# Altium PCB omni robot pcb.PcbDoc
Units mm, origin at the board's own origin, x right, y up, seen from the top; angles counter-clockwise.
Board outline 100 x 100 mm, 2 copper layers (Top Layer, Bottom Layer); 26 components, 63 nets, 301 pads, 50 vias.
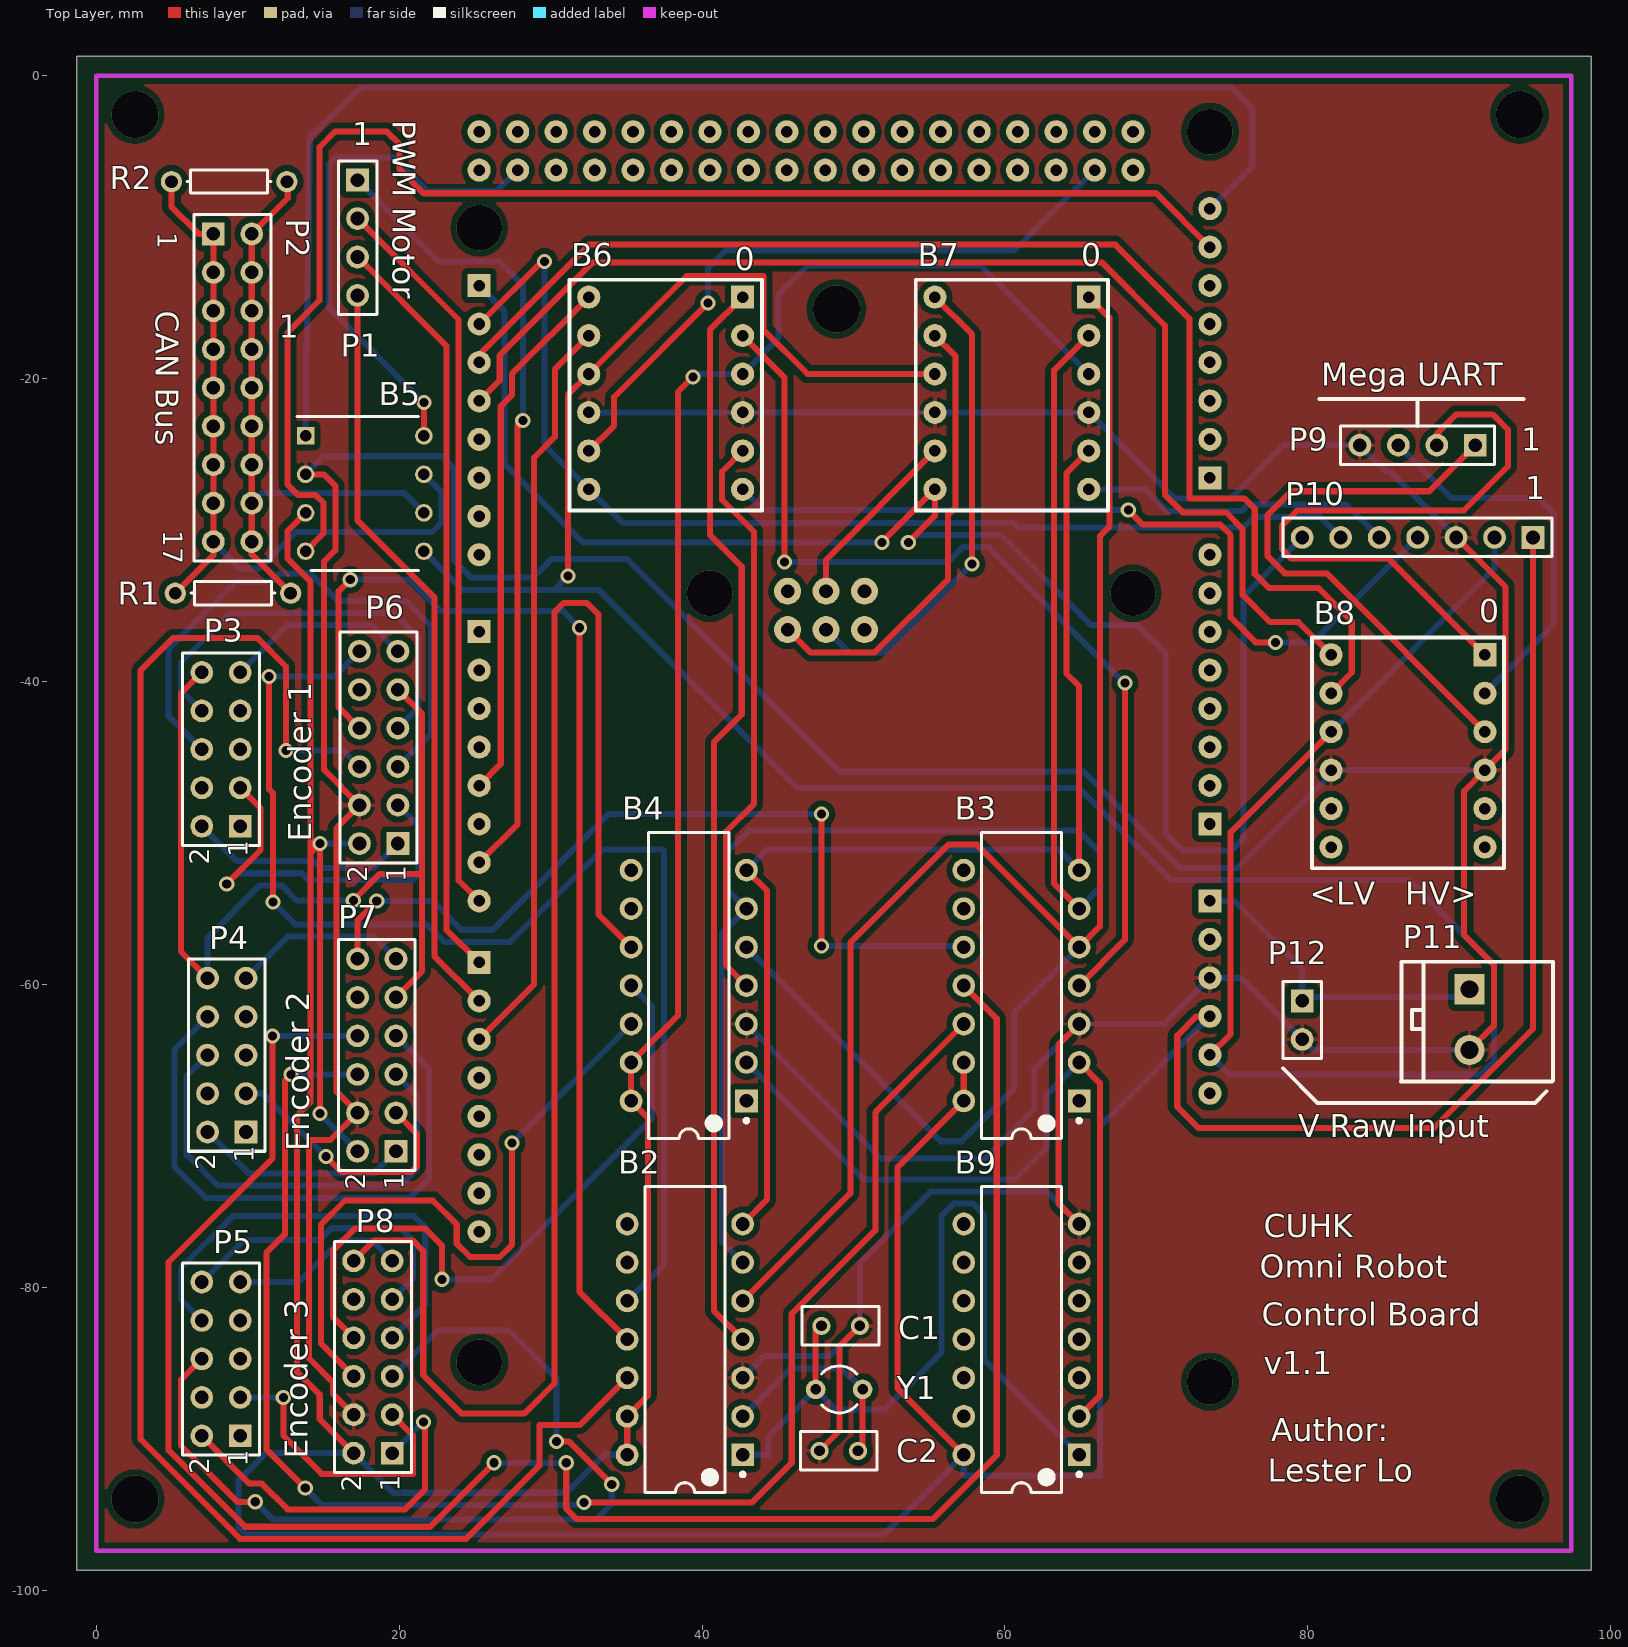
[diagram p0: Top Layer view]
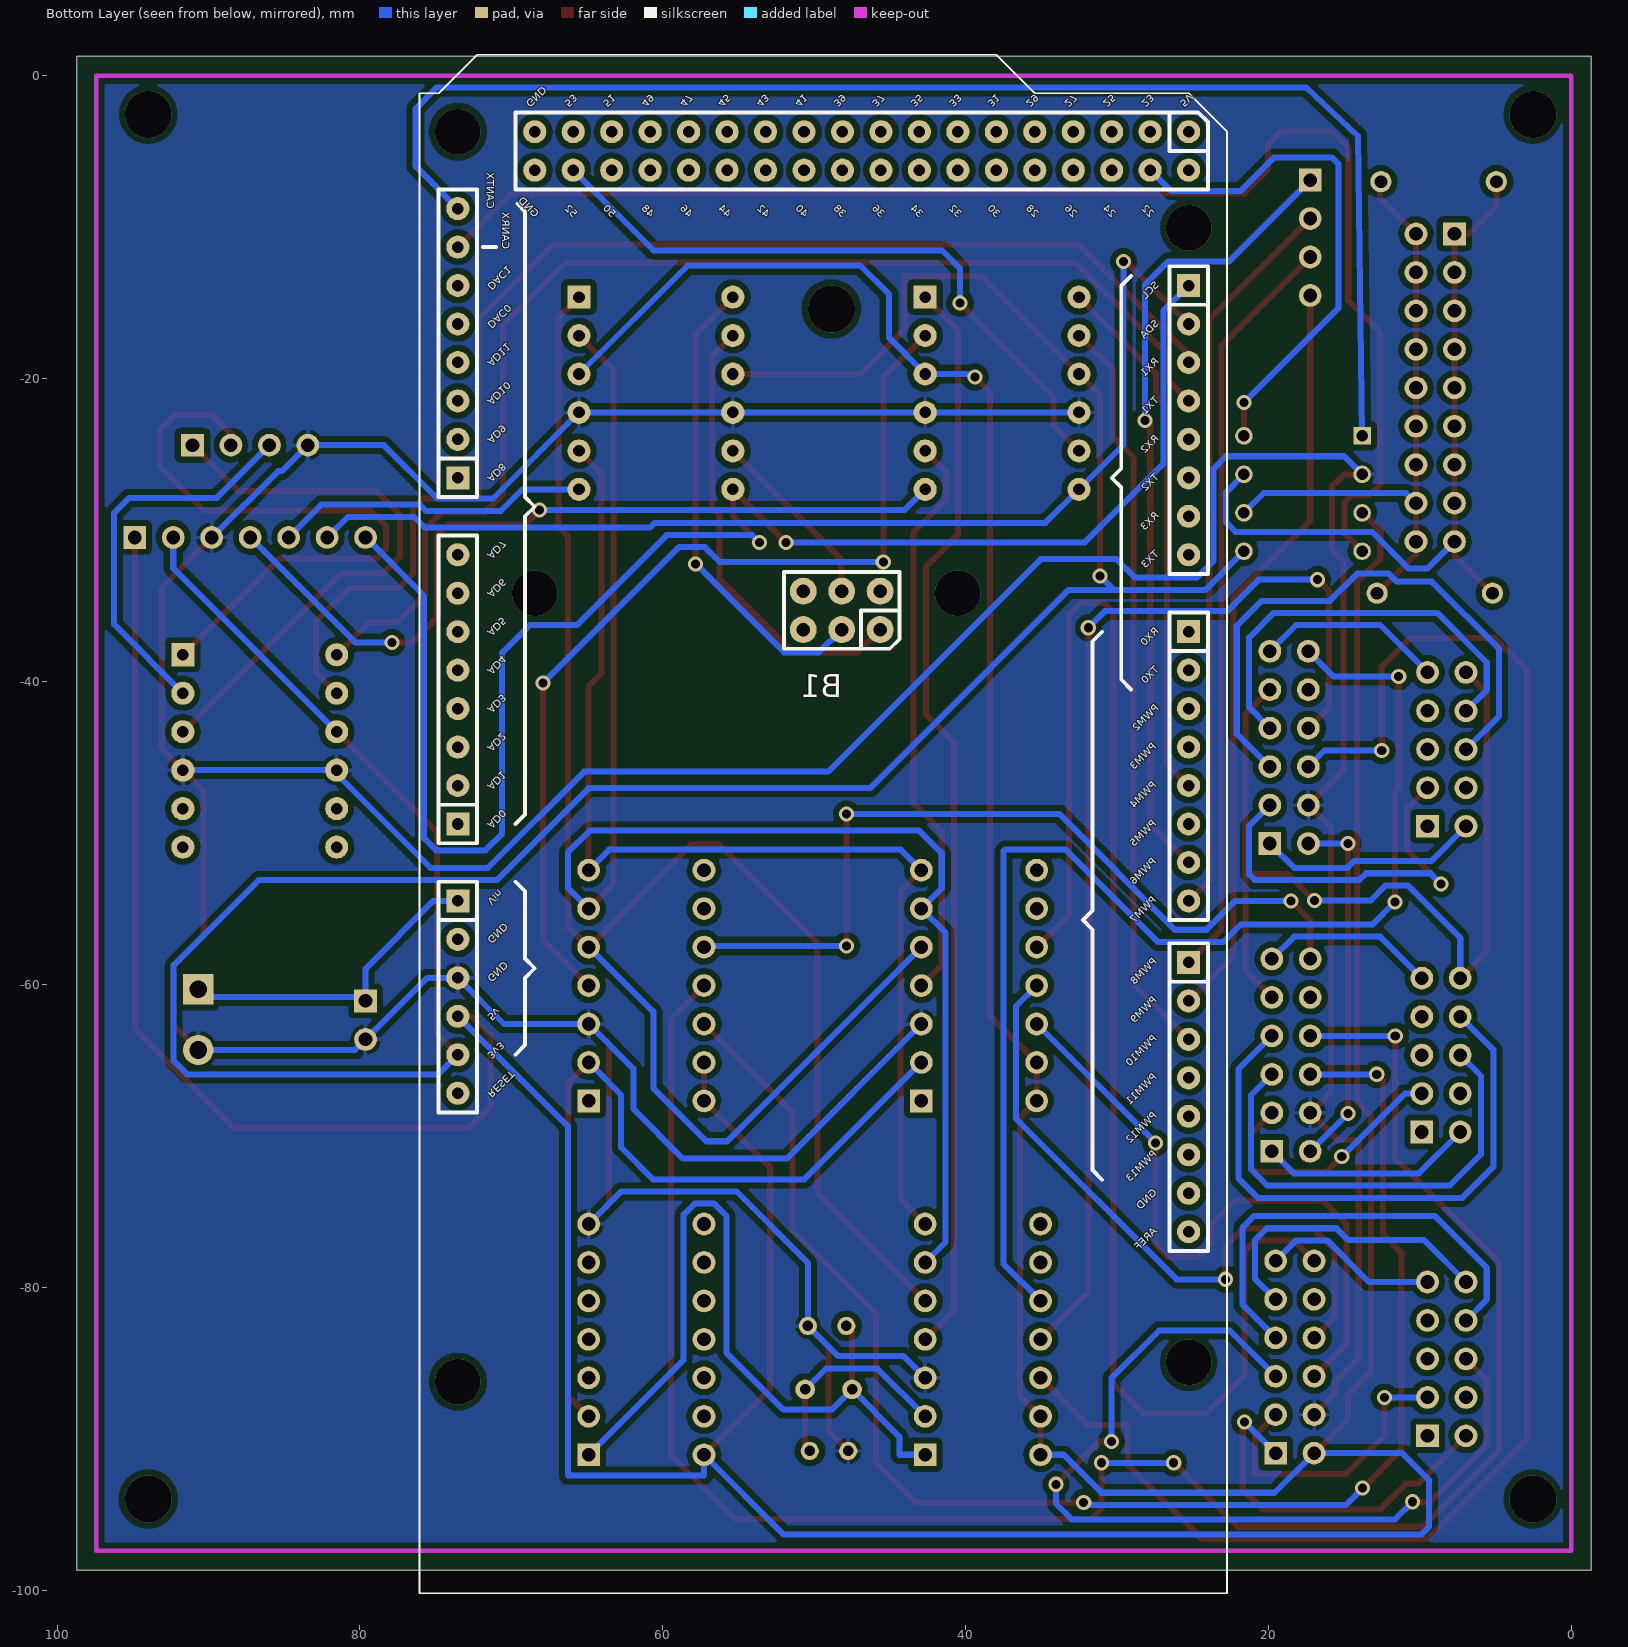
[diagram p1: Bottom Layer view, seen from below]

## Layer stack, top to bottom
Top Solder: solder mask 0.0102, Solder Resist, Dk 3.5
Top Layer: signal copper 0.0356
Dielectric 1: dielectric 0.32, FR-4, Dk 4.8
Bottom Layer: signal copper 0.0356
Bottom Solder: solder mask 0.0102, Solder Resist, Dk 3.5

## Board outline
-1.3,-98.7 98.7,-98.7 98.7,1.3 -1.3,1.3

## Design rules (kind name [scope] priority, off if disabled: settings)
Clearance [All] p1: gap=0.4 ignorepadtopadclearanceinfootprint=TRUE
PolygonConnect [All] p1: connectstyle=Relief reliefconductorwidth=0.254 reliefentries=4 polygonreliefangle="90 Angle" airgapwidth=0.254
RoutingVias [All] p1: holewidth=0.6 width=1 viastyle="Through Hole" minholewidth=0.711 minwidth=1.27 maxholewidth=0.711 maxwidth=1.27
SolderMaskExpansion [All] p1: expansion=0.102
Width [All] p1: maxlimit=0.6 minlimit=0.3 preferedwidth=0.4
30 further rules are at their usual default settings.

## Classes and differential pairs
component class "arduino due component connection 2": B5 B6 B7 B8
component class "arduino due component connection": B2 B3 B4 B9 C1 C2 Y1
component class "arduino due connection": B1
component class "outgoing connection": P1 P2 P3 P4 P5 P6 P7 P8 P9 P10 P11 P12 R1

## Components (designator, comment, footprint, x,y, rotation, side; value= is the part's Value field where it differs from the comment)
B1 "arduino due" PCBComponent_1 49.403,-40.005 r90 bottom
B2 "Component_1" DIP-14 38.862,-83.439 r180 top
B3 "Component_1" DIP-14 61.087,-60.071 r180 top
B4 "Component_1" DIP-14 39.116,-60.071 r180 top
B5 "MCP2562-E_P" DIP781W56P254L950H533Q8N 17.718,-27.58 r0 top
B6 "Level Shifter 4 Channel" "level shifter 4C" 42.672,-14.605 r0 top
B7 "Level Shifter 4 Channel" "level shifter 4C" 65.532,-14.605 r0 top
B8 "Level Shifter 4 Channel" "level shifter 4C" 91.694,-38.227 r0 top
B9 "Component_1" DIP-14 61.087,-83.439 r180 top
C1 "Cap" RAD-0.1 49.149,-82.55 r180 top value=22pF
C2 "Cap" RAD-0.1 49.022,-90.805 r0 top value=22pF
P1 "Header 4" HDR1X4 17.242,-6.879 r270 top
P2 "Header 9X2" HDR2X9 7.717,-10.435 r270 top
P3 "Header 5X2" HDR2X5 9.495,-49.551 r90 top
P4 "Header 5X2" HDR2X5 9.876,-69.744 r90 top
P5 "Header 5X2" HDR2X5 9.495,-89.81 r90 top
P6 "Header 6X2" HDR2X6 19.909,-50.694 r90 top
P7 "Header 6X2" HDR2X6 19.782,-71.014 r90 top
P8 "Header 6X2" HDR2X6 19.528,-90.953 r90 top
P9 "Header 4" HDR1X4 91.059,-24.384 r180 top
P10 "Header 7" HDR1X7 94.869,-30.48 r180 top
P11 "big Pin power port" bigPin_power_port 90.678,-62.325 r0 top
P12 "Header 2" HDR1X2 79.629,-61.087 r270 top
R1 "Res1" AXIAL-0.3 9.017,-34.163 r0 top value=120
R2 "Res1" AXIAL-0.3 8.763,-6.985 r0 top value=120
Y1 "XTAL" R38 49.048,-86.741 r90 top

## Footprints (in the part's own frame and the unit in brackets; to place one, negate y for a bottom-side part, rotate by r counter-clockwise, add the part's x,y. Pads: shape width x height; smd on the part's side, far side on the other; paste and mask are expansions set on the pad)
AXIAL-0.3 [mm] "Axial Device, Thru-Hole; 2 Leads; 0.3 in Pin Spacing"
  round 1.4 hole 0.85: 1(-3.81,0) 2(3.81,0)
  silkscreen extent -2.77,-0.76 2.77,0.76
bigPin_power_port [mm]
  rect 2x2 hole 1.17: 1(0,2)
  round 2 hole 1.17: 2(0,-2)
  silkscreen extent -4.54,-4.08 5.51,3.82
DIP781W56P254L950H533Q8N [mm]
  rect 1.159x1.159 / inner round 1.159 / far side rect 1.159x1.159 hole 0.759: 1(-3.905,3.81)
  round 1.159 hole 0.759: 2(-3.905,1.27) 3(-3.905,-1.27) 4(-3.905,-3.81) 5(3.905,-3.81) 6(3.905,-1.27) 7(3.905,1.27) 8(3.905,3.81)
  silkscreen extent -4.48,-5.08 3.56,5.08
DIP-14 [mm] "DIP; 14 Leads; Row Spacing 7.62 mm; Pitch 2.54 mm"
  rect 1.5x1.5 hole 0.9: 1(-3.81,7.62)
  round 1.5 hole 0.9: 2(-3.81,5.08) 3(-3.81,2.54) 4(-3.81,0) 5(-3.81,-2.54) 6(-3.81,-5.08) 7(-3.81,-7.62) 8(3.81,-7.62) 9(3.81,-5.08) 10(3.81,-2.54) 11(3.81,0) 12(3.81,2.54) 13(3.81,5.08) 14(3.81,7.62)
  silkscreen extent -3.94,-10.1 2.65,10.1, body extent -3.6,-10.1 3.6,10.1, height 5.08
HDR1X2 [mm] "Connector; Header; 2 Position"
  rect 1.5x1.5 hole 0.9: 1(0,0)
  round 1.5 hole 0.9: 2(2.54,0)
  silkscreen extent -1.27,-1.27 3.81,1.27
HDR1X4 [mm] "Connector; Header; 4 Position"
  rect 1.5x1.5 hole 0.9: 1(0,0)
  round 1.5 hole 0.9: 2(2.54,0) 3(5.08,0) 4(7.62,0)
  silkscreen extent -1.27,-1.27 8.89,1.27
HDR1X7 [mm] "Connector; Header; 7 Position"
  rect 1.5x1.5 hole 0.9: 1(0,0)
  round 1.5 hole 0.9: 2(2.54,0) 3(5.08,0) 4(7.62,0) 5(10.16,0) 6(12.7,0) 7(15.24,0)
  silkscreen extent -1.27,-1.27 16.51,1.27
HDR2X5 [mm] "Connector; Header; 5x2 Position"
  rect 1.5x1.5 hole 0.9: 1(0,0)
  round 1.5 hole 0.9: 2(0,2.54) 3(2.54,0) 4(2.54,2.54) 5(5.08,0) 6(5.08,2.54) 7(7.62,0) 8(7.62,2.54) 9(10.16,0) 10(10.16,2.54)
  silkscreen extent -1.27,-1.27 11.43,3.81
HDR2X6 [mm] "Connector; Header; 6x2 Position"
  rect 1.5x1.5 hole 0.9: 1(0,0)
  round 1.5 hole 0.9: 2(0,2.54) 3(2.54,0) 4(2.54,2.54) 5(5.08,0) 6(5.08,2.54) 7(7.62,0) 8(7.62,2.54) 9(10.16,0) 10(10.16,2.54) 11(12.7,0) 12(12.7,2.54)
  silkscreen extent -1.27,-1.27 13.97,3.81
HDR2X9 [mm] "Connector; Header; 9x2 Position"
  rect 1.5x1.5 hole 0.9: 1(0,0)
  round 1.5 hole 0.9: 2(0,2.54) 3(2.54,0) 4(2.54,2.54) 5(5.08,0) 6(5.08,2.54) 7(7.62,0) 8(7.62,2.54) 9(10.16,0) 10(10.16,2.54) 11(12.7,0) 12(12.7,2.54) 13(15.24,0) 14(15.24,2.54) 15(17.78,0) 16(17.78,2.54) 17(20.32,0) 18(20.32,2.54)
  silkscreen extent -1.27,-1.27 21.59,3.81
"level shifter 4C" [mil]
  rect 60x60 hole 30: 0(0,0)
  round 60 hole 30: 1(0,-100) 2(0,-200) 3(0,-300) 4(0,-400) 5(0,-500) 6(-400,-500) 7(-400,-400) 8(-400,-300) 9(-400,-200) 10(-400,-100) 11(-400,0)
  silkscreen extent -450,-555 50,45
PCBComponent_1 [mil]
  rect 60x60 hole 30: 0(130,-950) 8(-730,-950) 21(1030,-950) 59(-570,950) 60(-370,950) 68(530,950)
  round 60 hole 30: 1(30,-950) 2(-70,-950) 3(-170,-950) 4(-270,-950) 5(-370,-950) 6(-470,-950) 7(-570,-950) 9(-830,-950) 10(-930,-950) 11(-1030,-950) 12(-1130,-950) 13(-1230,-950) 14(330,-950) 15(430,-950) 16(530,-950) 17(630,-950) 18(730,-950) 19(830,-950) 20(930,-950) 22(1330,-850) 23(1430,-850) 24(1330,-750) 25(1430,-750) 26(1330,-650) 27(1430,-650) 28(1330,-550) 29(1430,-550) 30(1330,-450) 31(1430,-450) 32(1330,-350) 33(1430,-350) 34(1330,-250) 35(1430,-250) 36(1330,-150) 37(1430,-150) 38(1330,-50) 39(1430,-50) 40(1330,50) 41(1430,50) 42(1330,150) 43(1430,150) 44(1330,250) 45(1430,250) 46(1330,350) 47(1430,350) 48(1330,450) 49(1430,450) 50(1330,550) 51(1430,550) 52(1330,650) 53(1430,650) 54(-1070,950) 55(-970,950) 56(-870,950) 57(-770,950) 58(-670,950) 61(-270,950) 62(-170,950) 63(-70,950) 64(30,950) 65(130,950) 66(230,950) 67(330,950) 69(630,950) 70(730,950) 71(830,950) 72(930,950) 73(1030,950) 74(1130,950) 75(1230,950) 76(-1330,-950) 77(-1430,-950) 78(1330,750) 79(1430,750) 80(1330,-950) 81(1430,-950)
  round 70 hole 35.43: 82(135.51,-148.03) 83(235.51,-148.03) 84(135.51,-48.03) 85(235.51,-48.03) 86(135.51,51.97) 87(235.51,51.97)
  silkscreen extent -2370,-1050 1630,1050
R38 [mm] "Crystal, Thru-Hole; 2 Leads; Body 3.1 x 8.2 mm (Dia.xH)"
  round 1.3 hole 0.7: 1(0,1.55) 2(0,-1.55)
  silkscreen extent -1.55,-1.19 1.55,1.17
RAD-0.1 [mm] "Radial Cap, Thru-Hole; 2 Leads; 0.1 in Pin Spacing"
  round 1.2 hole 0.7: 1(-1.27,0) 2(1.27,0)
  silkscreen extent -2.54,-1.27 2.54,1.27

## Part data
B5: "CAN Transceiver 1Mbps 5V 125degC PDIP8 Microchip MCP2562-E/P, CAN Transceiver 1-channel IEC 61000-4-2, 8-Pin PDIP", Manufacturer_Name=Microchip, Manufacturer_Part_Number=MCP2562-E/P, RS Part Number=7990225, Datasheet Link=http://uk.rs-online.com/webdocs/1380/0900766b81380aaf.pdf, Geometry.Height=5.334mm, Supplier_Name=RS
C1 C2: "Capacitor", LatestRevisionDate=17-Jul-2002, LatestRevisionNote="Re-released for DXP Platform.", PackageDescription="Radial Cap, Thru-Hole; 2 Leads; 0.3 in Pin Spacing", PackageReference=RAD-0.3, Published=8-Jun-2000, Publisher="Altium Limited"
P1 P9: "Header, 4-Pin", LatestRevisionDate=17-Jul-2002, LatestRevisionNote="Re-released for DXP Platform.", Publisher="Altium Limited"
  P1: usage="Motor Driver Connector"
P2: "Header, 9-Pin, Dual row", LatestRevisionDate=17-Jul-2002, LatestRevisionNote="Re-released for DXP Platform.", Publisher="Altium Limited"
P3 P4 P5: "Header, 5-Pin, Dual row", LatestRevisionDate=17-Jul-2002, LatestRevisionNote="Re-released for DXP Platform.", Publisher="Altium Limited"
  P3: usage="Encoder 1"
  P4: usage="Encoder 2"
  P5: usage="Encoder 3"
P6 P7 P8: "Header, 6-Pin, Dual row", LatestRevisionDate=17-Jul-2002, LatestRevisionNote="Re-released for DXP Platform.", Publisher="Altium Limited"
P10: "Header, 7-Pin", LatestRevisionDate=17-Jul-2002, LatestRevisionNote="Re-released for DXP Platform.", Publisher="Altium Limited"
P12: "Header, 2-Pin", LatestRevisionDate=17-Jul-2002, LatestRevisionNote="Re-released for DXP Platform.", Publisher="Altium Limited"
R1 R2: "Resistor", LatestRevisionDate=17-Jul-2002, LatestRevisionNote="Re-released for DXP Platform.", PackageDescription="Axial Device, Thru-Hole; 2 Leads; 0.3 in Pin Spacing", PackageReference=AXIAL-0.3, Published=8-Jun-2000, Publisher="Altium Limited"
Y1: "Crystal Oscillator", LatestRevisionDate=17-Jul-2002, LatestRevisionNote="Re-released for DXP Platform.", PackageDescription="Crystal, Thru-Hole; 2 Leads; Body 3.1 x 8.2 mm (Dia.xH)", PackageReference=R38, Published=8-Jun-2000, Publisher="Altium Limited"
B6: usage="Due Chip Select Logic Shifter"
B7: usage="Due SPI Logic Shifter"
B8: usage="Mega Commu Logic Shifter"

## Via types
v1: diameter 1, hole 0.6, Top Layer to Bottom Layer, 39 vias
v2: diameter 3, hole 3, Top Layer to Bottom Layer, 6 vias
v3: diameter 3.1, hole 3.1, Top Layer to Bottom Layer, 5 vias

## Nets (pads, with @x,y where several pads share a name; then routed paths per layer and width w, separated by ;. In a path a pad name is that pad's centre, name@x,y a point inside that pad or via, vN(x,y) a via of type N, cw(c..) or ccw(c..) an arc to the next point about the centre after c; other vN are vias at no path point)
3.3v_due: B1.55 B5.5 B6.9 B7.9 B8.9 P10.2 | length 195.4
  Top Layer w0.4: v1(31.136,-33.016) 31.136,-21.061 B6.9 38.968,-13.229 44.039,-13.229 44.039,-16.764 46.96,-19.685 B7.9 ; B1.55 74.9,-63.276 74.9,-49.941 B8.9
  Bottom Layer w0.4: B5.5 24.188,-33.955 30.196,-33.955 ; v1(31.136,-33.016) 30.196,-33.955 ; B1.55 74.824,-65.934 91.41,-65.934 92.299,-65.045 92.299,-58.72 86.686,-53.107 70.963,-53.107 64.892,-47.036 46.3,-47.036 33.219,-33.955 30.196,-33.955 ; B8.9 92.329,-32.512 P10.2
3.3vLevel_due_SPI_MISO: B1.82 B7.10 | length 30.1
  Top Layer w0.4: B1.82 47.15,-38.07 51.405,-38.07 56.244,-33.231 56.244,-28.97 56.739,-28.475 56.739,-18.512 B7.10
3.3vLevel_due_SPI_MOSI: B1.85 B7.7 | length 12.2
  Top Layer w0.4: B1.85 48.183,-31.954 B7.7
3.3vLevel_due_SPI_SCL: B1.84 B7.11 | length 31.3
  Top Layer w0.4: B7.11 57.831,-17.064 v1(57.831,-32.228)
  Bottom Layer w0.4: B1.84 49.69,-38.07 51.989,-38.07 v1(57.831,-32.228)
3.3vLevel_ec_counter1_SPI_SS: B1.4 B6.11 | length 35.3
  Top Layer w0.4: B1.4 26.701,-45.435 26.701,-21.819 27.435,-21.085 27.435,-19.682 B6.11
3.3vLevel_ec_counter2_SPI_SS: B1.10 B6.10 | length 49.5
  Top Layer w0.4: B1.10 28.908,-59.992 28.908,-25.2 30.276,-23.832 30.276,-19.381 B6.10
3.3vLevel_ec_counter3_SPI_SS: B1.52 B6.7 | length 43.5
  Top Layer w0.4: B6.7 34.184,-23.093 34.184,-21.205 v1(40.381,-15.007)
  Bottom Layer w0.4: v1(40.381,-15.007) 40.381,-12.696 41.55,-11.527 60.609,-11.527 B1.52
5v_due: B1.56 B2.13 B2.14 B3.13 B3.14 B4.13 B4.14 B5.3 B6.2 B7.2 B9.14 P6.2 P7.2 P8.2 P10.1 | length 419.5
  Top Layer w0.4: B5.3 12.619,-30.044 12.619,-31.884 14.143,-33.408 14.143,-51.304 ; v1(14.753,-68.525) v1(14.753,-50.694) 14.143,-51.304 ; P8.2 14.748,-88.713 14.748,-87.091 13.238,-85.581 13.238,-68.662 14.143,-67.757 14.143,-51.304 ; B2.14 B2.13 36.419,-87.152 36.419,-68.804 B4.14 B4.13 38.4,-62.057 38.4,-20.874 v1(39.391,-19.884) ; B9.14 52.904,-86.686 52.904,-72.064 B3.14 B3.13 ; B1.56 72.644,-62.103 71.374,-63.373 71.374,-68.072 72.771,-69.469 88.332,-69.469 94.869,-62.932 P10.1
  Bottom Layer w0.4: v1(14.753,-68.525) P7.2 ; v1(14.753,-50.694) P6.2 ; B2.14 33.528,-91.059 31.019,-93.569 19.604,-93.569 P8.2 11.173,-90.953 9.386,-92.741 9.386,-95.812 9.911,-96.338 51.998,-96.338 B9.14 57.277,-92.426 66.264,-92.426 66.264,-69.372 B1.56 ; v1(39.391,-19.884) 39.59,-19.685 B6.2 45.055,-17.302 45.055,-14.423 46.96,-12.518 58.365,-12.518 B7.2
5v_mega: B8.2 P9.1 | length 37.5
  Top Layer w0.4: P9.1 88.015,-27.428 78.901,-27.428 77.343,-28.986 77.343,-31.725 78.47,-32.852 81.239,-32.852 B8.2
5vLevel_due_SCL: B7.5 P10.5 | length 20.8
  Bottom Layer w0.4: B7.5 69.266,-27.305 70.684,-28.723 75.645,-28.723 76.077,-28.291 82.52,-28.291 P10.5
5vLevel_due_SDA: B6.5 P10.4 | length 54.8
  Top Layer w0.4: v1(68.144,-28.672) 69.1,-29.629 74.206,-29.629 74.895,-30.318 74.895,-35.754 76.551,-37.41 v1(77.872,-37.41)
  Bottom Layer w0.4: B6.5 44.039,-28.672 v1(68.144,-28.672) ; v1(77.872,-37.41) 80.319,-37.41 P10.4
5vLevel_ec_counter1_SPI_SS: B2.4 B6.0 | length 72.1
  Top Layer w0.4: B2.4 40.776,-81.543 40.776,-44 42.617,-42.16 42.617,-32.406 40.51,-30.299 40.51,-16.767 B6.0
5vLevel_ec_counter2_SPI_SS: B3.4 B6.1 | length 63.9
  Top Layer w0.4: B6.1 45.436,-19.909 v1(45.436,-32.101) ; B3.4 67.915,-57.053 v1(67.915,-40.098)
  Bottom Layer w0.4: v1(45.436,-32.101) 56.244,-32.101 57.223,-31.122 58.939,-31.122 v1(67.915,-40.098)
5vLevel_ec_counter3_SPI_SS: B4.4 B6.4 | length 38.1
  Top Layer w0.4: B6.4 41.31,-26.127 41.31,-28.001 43.429,-30.12 43.429,-48.052 41.576,-49.906 41.576,-58.721 B4.4
5vLevel_levelShifted_due_SPI_MISO: B2.6 B3.6 B4.6 B7.1 | length 98.5
  Top Layer w0.4: B3.6 63.241,-53.335 63.241,-19.436 B7.1
  Bottom Layer w0.4: B2.6 41.321,-77.008 41.321,-56.596 B4.6 41.575,-53.64 41.575,-51.329 43.066,-49.838 64.824,-49.838 66.264,-51.278 66.264,-53.624 B3.6
5vLevel_levelShifted_due_SPI_MOSI: B2.7 B3.7 B4.7 B7.4 | length 76.3
  Top Layer w0.4: B2.7 44.293,-74.198 44.293,-53.818 B4.7 ; B3.7 64.897,-40.305 64.054,-39.463 64.054,-26.243 B7.4
  Bottom Layer w0.4: B4.7 44.277,-51.1 63.546,-51.1 B3.7
5vLevel_levelShifted_due_SPI_SCL: B2.5 B3.5 B4.5 B7.0 | length 127.1
  Top Layer w0.4: B2.5 49.784,-73.787 49.784,-57.243 56.256,-50.77 58.136,-50.77 B3.5 66.264,-56.164 66.264,-30.399 66.899,-29.764 66.899,-15.972 B7.0
  Bottom Layer w0.4: B4.5 55.749,-70.354 57.12,-70.354 60.625,-66.848 60.625,-61.803 B3.5
CAN_HIGH: B5.7 P2.1 P2.3 P2.5 P2.7 P2.9 P2.11 P2.13 P2.15 P2.17 R1.1 R2.1 | length 50.9
  Top Layer w0.4: R1.1 7.717,-31.653 P2.17 P2.15 P2.13 P2.11 P2.9 P2.7 P2.5 P2.3 P2.1 6.752,-10.435 4.953,-8.636 4.953,-7.484 R2.1@5.431,-7.006
  Bottom Layer w0.4: P2.17 9.506,-32.544 10.727,-32.544 13.151,-30.12 22.167,-30.12 22.802,-29.485 22.802,-27.489 B5.7
CAN_LOW: B5.6 P2.2 P2.4 P2.6 P2.8 P2.10 P2.12 P2.14 P2.16 P2.18 R1.2 R2.2 | length 41.6
  Top Layer w0.4: R1.2 10.257,-31.593 P2.18 P2.16 P2.14 P2.12 P2.10 P2.8 P2.6 P2.4 P2.2 12.632,-8.06 12.632,-7.425 R2.2@13.051,-7.006
  Bottom Layer w0.4: P2.16 10.917,-27.555 20.328,-27.555 B5.6
CAN_STBY: B1.22 B5.8 | length 34.6
  Top Layer w0.4: B5.8 v1(21.623,-21.572)
  Bottom Layer w0.4: v1(21.623,-21.572) 15.367,-15.316 15.367,-5.842 15.829,-5.38 19.63,-5.38 21.839,-7.59 26.446,-7.59 B1.22
CANBUS_RX: B1.74 B5.4 | length 93.1
  Top Layer w0.4: B5.4 14.992,-30.211 14.992,-28.2 14.463,-27.671 13.305,-27.671 12.619,-26.985 12.619,-16.937 14.732,-14.825 14.732,-4.699 15.748,-3.683 19.177,-3.683 20.018,-4.524 20.018,-6.175 21.59,-7.747 69.977,-7.747 B1.74
CANBUS_TX: B1.75 B5.1 | length 91.6
  Bottom Layer w0.4: B5.1 14.084,-3.979 17.526,-0.762 74.93,-0.762 76.327,-2.159 76.327,-5.969 B1.75
due_levelshifted_RX: B8.1 P9.3 | length 25.9
  Bottom Layer w0.4: P9.3 89.454,-27.859 95.245,-27.859 96.236,-28.85 96.236,-36.225 B8.1
due_levelshifted_TX: B8.0 P9.2 | length 43.2
  Top Layer w0.4: P9.2 88.519,-23.622 89.789,-22.352 92.202,-22.352 93.218,-23.368 93.218,-25.781 90.301,-28.698 79.294,-28.698 78.279,-29.713 78.279,-31.238 78.913,-31.873 85.34,-31.873 B8.0
due_RX1: B1.19 B8.10 | length 86.2
  Top Layer w0.4: B1.19 25.273,-18.415 32.542,-11.146 67.28,-11.146 72.171,-16.037 72.171,-27.91 75.823,-27.91 76.495,-28.583 76.495,-32.883 77.44,-33.828 80.717,-33.828 82.901,-36.013 82.901,-39.4 B8.10
due_SCL: B1.21 B7.6 P10.7 | length 108.5
  Top Layer w0.4: v1(51.871,-30.806) B7.6 55.372,-29.049 v1(53.615,-30.806)
  Bottom Layer w0.4: B1.21 26.945,-15.515 26.945,-25.624 32.126,-30.806 v1(51.871,-30.806) ; v1(53.615,-30.806) 54.098,-30.322 59.739,-30.322 65.683,-36.267 68.779,-36.267 70.612,-38.1 70.612,-50.038 71.717,-51.143 74.968,-51.143 75.764,-50.347 75.764,-34.345 P10.7
due_SDA: B1.20 B6.6 P10.6 | length 73.8
  Top Layer w0.4: B1.20 29.397,-12.259 v1(29.581,-12.259)
  Bottom Layer w0.4: v1(29.581,-12.259) 29.581,-24.374 B6.6 34.729,-29.522 60.539,-29.522 60.84,-29.823 75.73,-29.823 76.424,-29.129 80.818,-29.129 P10.6
due_TX1: B1.18 B8.11 | length 80.8
  Top Layer w0.4: B1.18 26.635,-20.101 26.635,-18.45 32.77,-12.315 66.391,-12.315 70.556,-16.48 70.556,-27.657 71.728,-28.829 74.594,-28.829 75.695,-29.93 75.695,-34.268 77.492,-36.065 79.372,-36.065 B8.11
ec1_5v: P3.2 P6.1 | length 14.8
  Bottom Layer w0.4: P3.2 9.259,-51.855 14.354,-51.855 14.798,-52.299 18.304,-52.299 P6.1
ec1_A: P3.6 P6.5 | length 38.6
  Bottom Layer w0.4: P3.6 4.771,-42.287 4.771,-37.842 9.216,-33.397 11.527,-33.397 12.061,-32.863 14.143,-32.863 15.943,-34.663 20.447,-34.663 22.093,-36.309 22.093,-43.43 P6.5
ec1_B: P3.8 P6.7 | length 28
  Bottom Layer w0.4: P3.8 5.583,-40.559 5.583,-38.74 8.86,-35.463 19.639,-35.463 21.281,-37.105 21.281,-41.702 P6.7
ec1_GND: P3.3 P6.3 | length 26.3
  Top Layer w0.4: v1(8.606,-53.361) 10.845,-51.122 10.845,-48.361 P3.3
  Bottom Layer w0.4: v1(8.606,-53.361) 9.312,-52.655 13.554,-52.655 13.998,-53.099 20.908,-53.099 21.281,-52.726 21.281,-49.526 P6.3
ec1_I: P3.10 P4.10 P6.9 P7.9 | length 62.6
  Top Layer w0.4: P3.10 5.583,-40.763 5.583,-57.831 P4.10 ; v1(16.963,-54.453) 18.715,-52.701 21.511,-52.701 ; P7.9 21.511,-59.125 21.511,-52.701 ; P6.9 21.511,-42.136 21.511,-52.701
  Bottom Layer w0.4: P4.10 7.336,-56.917 10.798,-53.455 12.243,-53.455 13.241,-54.453 v1(16.963,-54.453)
ec1_I/: P3.9 P6.11 | length 12.4
  Bottom Layer w0.4: P3.9 12.623,-36.263 18.178,-36.263 P6.11
ec2_5v: P4.2 P7.1 | length 14.2
  Bottom Layer w0.4: P4.2 10.062,-72.47 18.326,-72.47 P7.1
ec2_A: P4.6 P7.5 | length 30.4
  Bottom Layer w0.4: P4.6 5.964,-66.036 5.964,-71.217 8.022,-73.275 20.087,-73.275 21.154,-72.208 21.154,-67.306 P7.5
ec2_B: P4.8 P7.7 | length 39.3
  Bottom Layer w0.4: P4.8 5.152,-64.308 5.152,-72.03 7.209,-74.087 20.696,-74.087 21.966,-72.817 21.966,-65.578 P7.7
ec2_GND: P4.3 P7.3 | length 17.7
  Top Layer w0.4: v1(15.159,-71.37) 16.175,-72.386 20.798,-72.386 21.154,-72.03 21.154,-69.846 P7.3
  Bottom Layer w0.4: P4.3 10.994,-67.204 v1(15.159,-71.37)
ec2_I/: P4.9 P7.11 | length 11.7
  Bottom Layer w0.4: P4.9 12.619,-56.841 18.309,-56.841 P7.11
ec3_5v: P5.2 P8.1 | length 24.7
  Top Layer w0.4: P5.2 10.105,-92.96 10.917,-92.96 12.619,-94.661 20.379,-94.661 21.7,-93.341 21.7,-88.997 v1(21.592,-88.889)
  Bottom Layer w0.4: P8.1 v1(21.592,-88.889)
ec3_A: P5.6 P8.5 | length 60.9
  Top Layer w0.4: P5.6 5.583,-86.102 5.583,-90.445 9.302,-94.164 v1(10.486,-94.164) ; v1(30.374,-90.191) 31.212,-90.191 v1(34.031,-93.01)
  Bottom Layer w0.4: v1(10.486,-94.164) 11.643,-95.322 32.99,-95.322 34.031,-94.28 v1(34.031,-93.01) ; P8.5 22.551,-82.85 27.224,-82.85 30.374,-86 v1(30.374,-90.191)
ec3_B: P5.8 P8.7 | length 30.1
  Bottom Layer w0.4: P5.8 5.583,-80.818 5.583,-78.71 8.995,-75.299 20.968,-75.299 21.712,-76.043 21.712,-81.149 P8.7
ec3_GND: P5.3 P8.3 | length 19.5
  Top Layer w0.4: v1(12.34,-87.27) 12.34,-89.785 14.88,-92.325 20.9,-92.325 20.9,-89.785 P8.3
  Bottom Layer w0.4: P5.3 v1(12.34,-87.27)
ec3_I: P5.10 P8.9 | length 20.2
  Bottom Layer w0.4: P5.10 9.724,-76.881 14.727,-76.881 15.51,-76.099 20.095,-76.099 20.9,-76.903 20.9,-79.421 P8.9
ec3_I/: P5.9 P8.11 | length 11.7
  Bottom Layer w0.4: P5.9 13.371,-79.65 16.123,-76.898 18.173,-76.898 P8.11
ec_counter1_A: B2.12 P6.6 | length 113.7
  Top Layer w0.4: v1(12.518,-44.547) 12.518,-39.01 10.638,-37.13 5.05,-37.13 2.921,-39.259 2.921,-90.045 9.488,-96.612 24.419,-96.612 29.271,-91.76 29.271,-89.088 31.943,-89.088 B2.12
  Bottom Layer w0.4: v1(12.518,-44.547) 16.302,-44.547 P6.6
ec_counter1_B: B2.11 P6.8 | length 75.4
  Top Layer w0.4: v1(16.759,-33.27) 15.997,-34.032 15.997,-41.702 P6.8 ; v1(31.898,-36.445) 31.898,-80.285 B2.11
  Bottom Layer w0.4: v1(16.759,-33.27) 20.643,-33.27 22.7,-35.327 30.78,-35.327 v1(31.898,-36.445)
ec_counter1_I/: B2.10 P6.12 | length 81.8
  Top Layer w0.4: v1(11.4,-39.67) 11.4,-47.113 11.654,-47.367 v1(11.654,-54.555)
  Bottom Layer w0.4: v1(11.4,-39.67) 15.693,-39.67 P6.12 ; v1(11.654,-54.555) 13.127,-56.028 21.814,-56.028 22.971,-57.185 27.312,-57.185 33.396,-51.1 37.384,-51.1 37.486,-51.202 37.486,-78.465 B2.10
ec_counter2_A: B3.12 P7.6 | length 100.9
  Top Layer w0.4: v1(12.848,-65.934) 12.438,-66.344 12.438,-76.5 11.222,-77.716 11.222,-90.699 v1(13.788,-93.264) ; v1(32.203,-94.204) 43.302,-94.204 45.919,-91.588 45.919,-81.758 51.435,-76.242 51.435,-68.453 B3.12
  Bottom Layer w0.4: v1(12.848,-65.934) P7.6 ; v1(13.788,-93.264) 14.905,-94.382 32.025,-94.382 v1(32.203,-94.204)
ec_counter2_B: B3.11 P7.8 | length 131.3
  Top Layer w0.4: v1(11.629,-63.394) 11.629,-71.471 4.771,-78.329 4.771,-90.764 9.819,-95.812 22.035,-95.812 v1(26.259,-91.588) ; v1(31.026,-91.588) 31.026,-94.611 31.72,-95.304 55.233,-95.304 59.457,-91.08 59.457,-62.251 B3.11
  Bottom Layer w0.4: v1(11.629,-63.394) P7.8 ; v1(26.259,-91.588) v1(31.026,-91.588)
ec_counter2_I/: B3.10 P7.12 | length 55.8
  Top Layer w0.4: P7.12 17.242,-55.749 v1(18.512,-54.479) ; v1(47.874,-57.45) v1(47.874,-48.738)
  Bottom Layer w0.4: v1(18.512,-54.479) 22.194,-54.479 24.1,-56.385 26.181,-56.385 33.828,-48.738 v1(47.874,-48.738) ; v1(47.874,-57.45) 57.196,-57.45 B3.10
ec_counter3_A: B4.12 P8.6 | length 44.6
  Top Layer w0.4: P8.6 14.838,-83.723 14.838,-75.84 16.413,-74.265 22.22,-74.265 23.795,-75.84 23.795,-77.11 24.684,-77.999 26.64,-77.999 27.453,-77.186 v1(27.453,-70.464)
  Bottom Layer w0.4: v1(27.453,-70.464) B4.12
ec_counter3_B: B4.11 P8.8 | length 44.4
  Top Layer w0.4: P8.8 15.638,-81.983 15.638,-77.546 17.081,-76.103 21.678,-76.103 22.83,-77.255 v1(22.83,-79.472)
  Bottom Layer w0.4: v1(22.83,-79.472) 26.056,-79.472 36.673,-68.855 36.673,-61.438 B4.11
ec_counter3_I/: B4.10 P8.12 | length 101.4
  Top Layer w0.4: P8.12 18.338,-76.903 20.878,-76.903 21.581,-77.605 21.581,-85.805 24.1,-88.324 28.277,-88.324 30.247,-86.354 30.247,-35.412 30.861,-34.798 32.385,-34.798 33.168,-35.581 33.168,-55.393 B4.10
GND: B1.57 B2.3 B3.3 B4.3 B5.2 B6.3 B6.8 B7.3 B7.8 B8.3 B8.8 B9.7 C1.1 C2.1 P6.4 P7.4 P8.4 P9.4 P10.3 P11.2 P12.2 | length 382.2
  Top Layer w0.4: B5.2 15.007,-26.31 15.792,-27.095 15.792,-31.303 15.04,-32.056 15.04,-45.825 P6.4 15.863,-49.66 15.863,-67.095 P7.4 15.454,-70.262 14.038,-70.262 14.038,-84.683 15.616,-86.261 15.616,-87.041 P8.4 ; C2.1 49.068,-89.489 49.068,-83.901 C1.1 ; B9.7 63.546,-74.468 63.546,-63.962 B3.3 ; P10.3 93.061,-33.752 93.061,-44.48 B8.3 90.318,-47.223 90.318,-56.739 92.299,-58.72 92.299,-62.704 P11.2
  Bottom Layer w0.4: B5.2 15.007,-25.116 22.805,-25.116 23.617,-25.929 23.617,-32.025 24.71,-33.117 28.834,-33.117 30.036,-31.916 35.052,-31.916 49.081,-45.944 65.197,-45.944 71.56,-52.307 75.328,-52.307 81.534,-46.101 B8.8 B8.3 ; B6.8 B6.3 B7.8 B7.3 71.212,-27.905 74.9,-27.905 78.421,-24.384 P9.4 85.15,-26.095 85.404,-26.095 P10.3 ; B2.3 44.124,-84.527 48.442,-84.527 C1.1 50.419,-78.38 55.13,-73.669 62.747,-73.669 B9.7 ; B4.3 51.812,-71.497 58.669,-71.497 61.946,-68.22 61.946,-65.562 B3.3 70.485,-62.611 B1.57 75.565,-59.563 P12.2 80.327,-64.325 P11.2
NetB2_1: B2.1 B9.1 C1.2 Y1.1 | length 53
  Top Layer w0.4: Y1.1 47.498,-82.931 C1.2
  Bottom Layer w0.4: B2.1 44.378,-91.059 44.378,-89.861 Y1.1 48.84,-88.083 52.04,-88.083 55.799,-84.324 55.799,-75.281 56.611,-74.469 57.891,-74.469 58.627,-75.205 58.627,-84.789 B9.1
NetB2_2: B2.2 C2.2 Y1.2 | length 14
  Top Layer w0.4: C2.2 50.598,-90.499 Y1.2
  Bottom Layer w0.4: B2.2 45.826,-85.365 49.222,-85.365 Y1.2
NetB3_2: B3.2 B4.2 B9.2 | length 54.9
  Top Layer w0.4: B9.2 66.264,-87.152 66.264,-66.518 B3.2
  Bottom Layer w0.4: B4.2 50.644,-72.869 60.65,-72.869 62.759,-70.76 62.759,-67.289 B3.2
PWM_Motor1: B1.6 P1.1 | length 53.1
  Top Layer w0.4: B1.6 27.808,-49.408 27.808,-23.095 v1(28.157,-22.747)
  Bottom Layer w0.4: P1.1 22.627,-12.264 26.64,-12.264 28.157,-13.78 v1(28.157,-22.747)
PWM_Motor2: B1.7 P1.2 | length 48.4
  Top Layer w0.4: P1.2 23.911,-16.088 23.911,-53.121 B1.7
PWM_Motor3: B1.8 P1.3 | length 49.9
  Top Layer w0.4: P1.3 23.111,-17.828 23.111,-56.385 B1.8
PWM_Motor4: B1.9 P1.4 | length 49.9
  Top Layer w0.4: P1.4 17.242,-29.368 22.311,-34.437 22.311,-58.125 B1.9
V_RAW: B1.59 P11.1 P12.1 | length 21.4
  Bottom Layer w0.4: B1.59 75.158,-54.483 79.629,-58.954 P12.1 79.883,-60.833 90.17,-60.833 P11.1
pads on no net: B1.0 B1.1 B1.2 B1.3 B1.5 B1.11 B1.12 B1.13 B1.14 B1.15 B1.16 B1.17 B1.23 B1.24 B1.25 B1.26 B1.27 B1.28 B1.29 B1.30 B1.31 B1.32 B1.33 B1.34 B1.35 B1.36 B1.37 B1.38 B1.39 B1.40 B1.41 B1.42 B1.43 B1.44 B1.45 B1.46 B1.47 B1.48 B1.49 B1.50 B1.51 B1.53 B1.54 B1.58 B1.60 B1.61 B1.62 B1.63 B1.64 B1.65 B1.66 B1.67 B1.68 B1.69 B1.70 B1.71 B1.72 B1.73 B1.76 B1.77 B1.78 B1.79 B1.80 B1.81 B1.83 B1.86 B1.87 B2.8 B2.9 B3.1 B3.8 B3.9 B4.1 B4.8 B4.9 B8.4 B8.5 B8.6 B8.7 B9.3 B9.4 B9.5 B9.6 B9.8 B9.9 B9.10 B9.11 B9.12 B9.13 P3.1 P3.4 P3.5 P3.7 P4.1 P4.4 P4.5 P4.7 P5.1 P5.4 P5.5 P5.7 P6.10 P7.10 P8.10
copper on no net:
  other v2: 73.533,-86.233 25.273,-84.963 40.513,-34.163 68.453,-34.163 25.273,-10.033 73.533,-3.683
  other v3: 2.54,-93.98 93.98,-93.98 48.865,-15.388 2.54,-2.54 93.98,-2.54

## Polygon pours and split planes (outlines as drawn)
GND on Top Layer "Top Layer GND trace" (solid, remove dead copper, pour order 0): -1.3,-98.7 98.7,-98.7 98.7,1.3 -1.3,1.3
GND on Bottom Layer "Bottom Layer GND trace" (solid, remove dead copper, pour order 1): -1.3,-98.7 98.7,-98.7 98.7,1.3 -1.3,1.3

## Keep-outs
Keep-Out Layer:
  lines w0.3: 0,-97.4 97.4,-97.4 97.4,0 0,0 0,-97.4

## Silkscreen, mask and mechanical layers (free items; w line width, h text height)
Top Overlay:
  lines w0.254: 78.359,-65.532 80.645,-67.818 94.996,-67.818 95.758,-67.056 ; 80.772,-21.336 87.249,-21.336 ; 87.249,-23.114 87.249,-21.336 ; 94.234,-21.336 87.249,-21.336
  text "PWM Motor" at 19.558,-2.921 h1.52 r270
  text "1" at 16.891,-4.572 h1.52
  text "0" at 65.024,-12.573 h1.52
  text "0" at 42.164,-12.827 h1.52
  text "CAN Bus" at 3.907,-15.515 h1.52 r270
  text "1" at 12.035,-17.293 h1.52
  text "Mega UART" at 80.899,-20.447 h1.52
  text "1" at 94.107,-24.765 h1.52
  text "1" at 94.361,-27.94 h1.52
  text "0" at 91.313,-36.068 h1.52
  text "Encoder 1" at 14.194,-50.567 h1.52 r90
  text "<LV   HV>" at 80.137,-54.737 h1.52
  text "V Raw Input" at 79.375,-70.104 h1.52
  text "Encoder 2" at 14.067,-71.014 h1.52 r90
  text "CUHK" at 77.089,-76.708 h1.52
  text "Omni Robot" at 76.835,-79.375 h1.52
  text "Control Board" at 76.962,-82.55 h1.52
  text "v1.1" at 77.089,-85.725 h1.52
  text "Author:" at 77.597,-90.17 h1.52
  text "Encoder 3" at 13.94,-91.334 h1.52 r90
  text "Lester Lo" at 77.343,-92.837 h1.52
Drill Drawing:
  text ".LEGEND" at 103.78,-93.62 h1.52
  text "Drill Drawing." at 103.78,-96.16 h1.52

## Dimensions
0,-97.4 to 97.4,-97.4 on Mechanical 1
0,-97.4 to 0,0 on Mechanical 1

## Text inside footprints (layer, text, board x,y; h text height)
B1: Bottom Overlay "RESET" at 71.628,-67.183 h0.51 r135; Bottom Overlay "3v3" at 71.628,-64.643 h0.51 r135; Bottom Overlay "5v" at 71.628,-62.103 h0.51 r135; Bottom Overlay "GND" at 71.628,-59.563 h0.51 r135; Bottom Overlay "GND" at 71.628,-57.023 h0.51 r135; Bottom Overlay "Vin" at 71.628,-54.483 h0.51 r135; Bottom Overlay "AD0" at 71.628,-49.403 h0.51 r135; Bottom Overlay "AD1" at 71.628,-46.863 h0.51 r135; Bottom Overlay "AD2" at 71.628,-44.323 h0.51 r135; Bottom Overlay "AD3" at 71.628,-41.783 h0.51 r135; Bottom Overlay "AD4" at 71.628,-39.243 h0.51 r135; Bottom Overlay "AD5" at 71.628,-36.703 h0.51 r135; Bottom Overlay "AD6" at 71.628,-34.163 h0.51 r135; Bottom Overlay "AD7" at 71.628,-31.623 h0.51 r135; Bottom Overlay "AD8" at 71.628,-26.543 h0.51 r135; Bottom Overlay "AD9" at 71.628,-24.003 h0.51 r135; Bottom Overlay "AD10" at 71.628,-21.463 h0.51 r135; Bottom Overlay "AD11" at 71.628,-18.923 h0.51 r135; Bottom Overlay "DAC0" at 71.628,-16.383 h0.51 r135; Bottom Overlay "DAC1" at 71.628,-13.843 h0.51 r135; Bottom Overlay "CANRX" at 70.612,-11.43 h0.51 r90; Bottom Overlay "CANTX" at 71.628,-8.763 h0.51 r90; Bottom Overlay "RX0" at 27.178,-36.703 h0.51 r315; Bottom Overlay "SCL" at 27.178,-13.843 h0.51 r315; Bottom Overlay "22" at 27.813,-9.398 h0.51 r45; Bottom Overlay "24" at 30.353,-9.398 h0.51 r45; Bottom Overlay "26" at 32.893,-9.398 h0.51 r45; Bottom Overlay "28" at 35.433,-9.398 h0.51 r45; Bottom Overlay "30" at 37.973,-9.398 h0.51 r45; Bottom Overlay "32" at 40.513,-9.398 h0.51 r45; Bottom Overlay "34" at 43.053,-9.398 h0.51 r45; Bottom Overlay "36" at 45.593,-9.398 h0.51 r45; Bottom Overlay "38" at 48.133,-9.398 h0.51 r45; Bottom Overlay "40" at 50.673,-9.398 h0.51 r45; Bottom Overlay "42" at 53.213,-9.398 h0.51 r45; Bottom Overlay "44" at 55.753,-9.398 h0.51 r45; Bottom Overlay "46" at 58.293,-9.398 h0.51 r45; Bottom Overlay "48" at 60.833,-9.398 h0.51 r45; Bottom Overlay "52" at 65.913,-9.398 h0.51 r45; Bottom Overlay "GND" at 68.453,-9.398 h0.51 r45; Bottom Overlay "50" at 63.373,-9.398 h0.51 r45; Bottom Overlay "5V" at 25.908,-1.778 h0.51 r135; Bottom Overlay "23" at 28.448,-1.778 h0.51 r135; Bottom Overlay "25" at 30.988,-1.778 h0.51 r135; Bottom Overlay "27" at 33.528,-1.778 h0.51 r135; Bottom Overlay "29" at 36.068,-1.778 h0.51 r135; Bottom Overlay "31" at 38.608,-1.778 h0.51 r135; Bottom Overlay "33" at 41.148,-1.778 h0.51 r135; Bottom Overlay "35" at 43.688,-1.778 h0.51 r135; Bottom Overlay "37" at 46.228,-1.778 h0.51 r135; Bottom Overlay "39" at 48.768,-1.778 h0.51 r135; Bottom Overlay "41" at 51.308,-1.778 h0.51 r135; Bottom Overlay "43" at 53.848,-1.778 h0.51 r135; Bottom Overlay "45" at 56.388,-1.778 h0.51 r135; Bottom Overlay "47" at 58.928,-1.778 h0.51 r135; Bottom Overlay "49" at 61.468,-1.778 h0.51 r135; Bottom Overlay "51" at 64.008,-1.778 h0.51 r135; Bottom Overlay "53" at 66.548,-1.778 h0.51 r135; Bottom Overlay "GND" at 69.088,-1.778 h0.51 r135; Bottom Overlay "SDA" at 27.178,-16.383 h0.51 r315; Bottom Overlay "RX1" at 27.178,-18.923 h0.51 r315; Bottom Overlay "TX1" at 27.178,-21.463 h0.51 r315; Bottom Overlay "RX2" at 27.178,-24.003 h0.51 r315; Bottom Overlay "TX2" at 27.178,-26.543 h0.51 r315; Bottom Overlay "RX3" at 27.178,-29.083 h0.51 r315; Bottom Overlay "TX3" at 27.178,-31.623 h0.51 r315; Bottom Overlay "TX0" at 27.178,-39.243 h0.51 r315; Bottom Overlay "PWM2" at 27.178,-41.783 h0.51 r315; Bottom Overlay "PWM3" at 27.358,-44.323 h0.51 r315; Bottom Overlay "PWM4" at 27.358,-46.863 h0.51 r315; Bottom Overlay "PWM5" at 27.358,-49.403 h0.51 r315; Bottom Overlay "PWM6" at 27.358,-51.943 h0.51 r315; Bottom Overlay "PWM7" at 27.358,-54.483 h0.51 r315; Bottom Overlay "PWM8" at 27.305,-58.547 h0.51 r315; Bottom Overlay "PWM9" at 27.305,-61.087 h0.51 r315; Bottom Overlay "PWM10" at 27.305,-63.627 h0.51 r315; Bottom Overlay "PWM11" at 27.305,-66.167 h0.51 r315; Bottom Overlay "PWM12" at 27.305,-68.707 h0.51 r315; Bottom Overlay "PWM13" at 27.305,-71.247 h0.51 r315; Bottom Overlay "GND" at 27.305,-73.787 h0.51 r315; Bottom Overlay "AREF" at 27.305,-76.327 h0.51 r315
P2: Top Overlay "1" at 4.034,-10.308 h1.27 r270; Top Overlay "17" at 4.415,-29.993 h1.27 r270
P3: Top Overlay "2" at 7.463,-52.091 h1.27 r90; Top Overlay "1" at 10.003,-51.583 h1.27 r90
P4: Top Overlay "2" at 7.844,-72.284 h1.27 r90; Top Overlay "1" at 10.384,-71.776 h1.27 r90
P5: Top Overlay "2" at 7.463,-92.35 h1.27 r90; Top Overlay "1" at 10.003,-91.842 h1.27 r90
P6: Top Overlay "2" at 17.877,-53.234 h1.27 r90; Top Overlay "1" at 20.417,-53.234 h1.27 r90
P7: Top Overlay "2" at 17.75,-73.554 h1.27 r90; Top Overlay "1" at 20.29,-73.554 h1.27 r90
P8: Top Overlay "2" at 17.496,-93.493 h1.27 r90; Top Overlay "1" at 20.036,-93.493 h1.27 r90